# Altium PCB Breathalyzer_PCB.PcbDoc
Units mil, origin at the board's own origin, x right, y up, seen from the top; angles counter-clockwise.
Board outline 3051.18 x 1181.1 mil, 2 copper layers (Top Layer, Bottom Layer); 16 components, 12 nets, 73 pads, 16 vias.
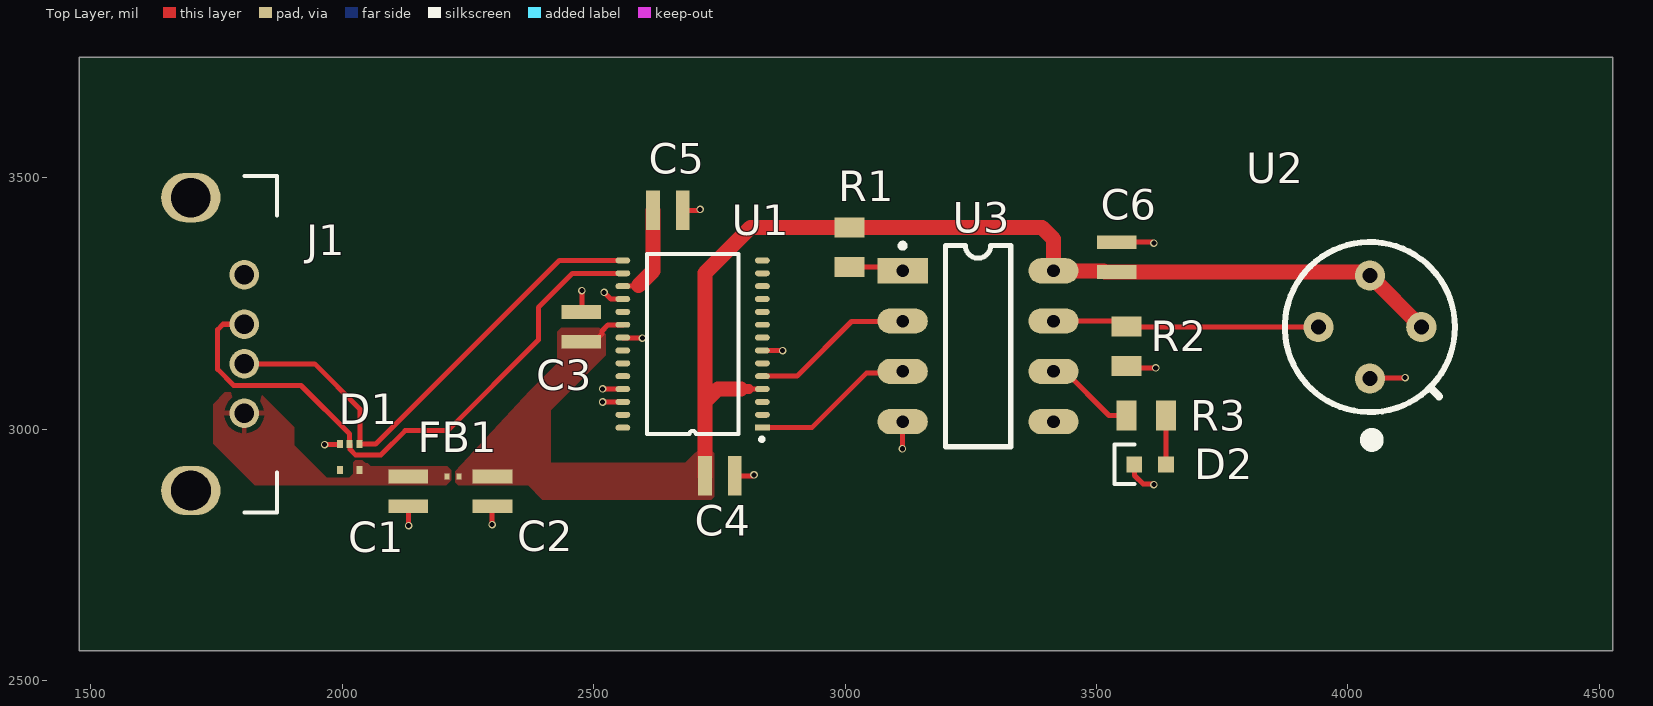
[diagram p0: Top Layer view]
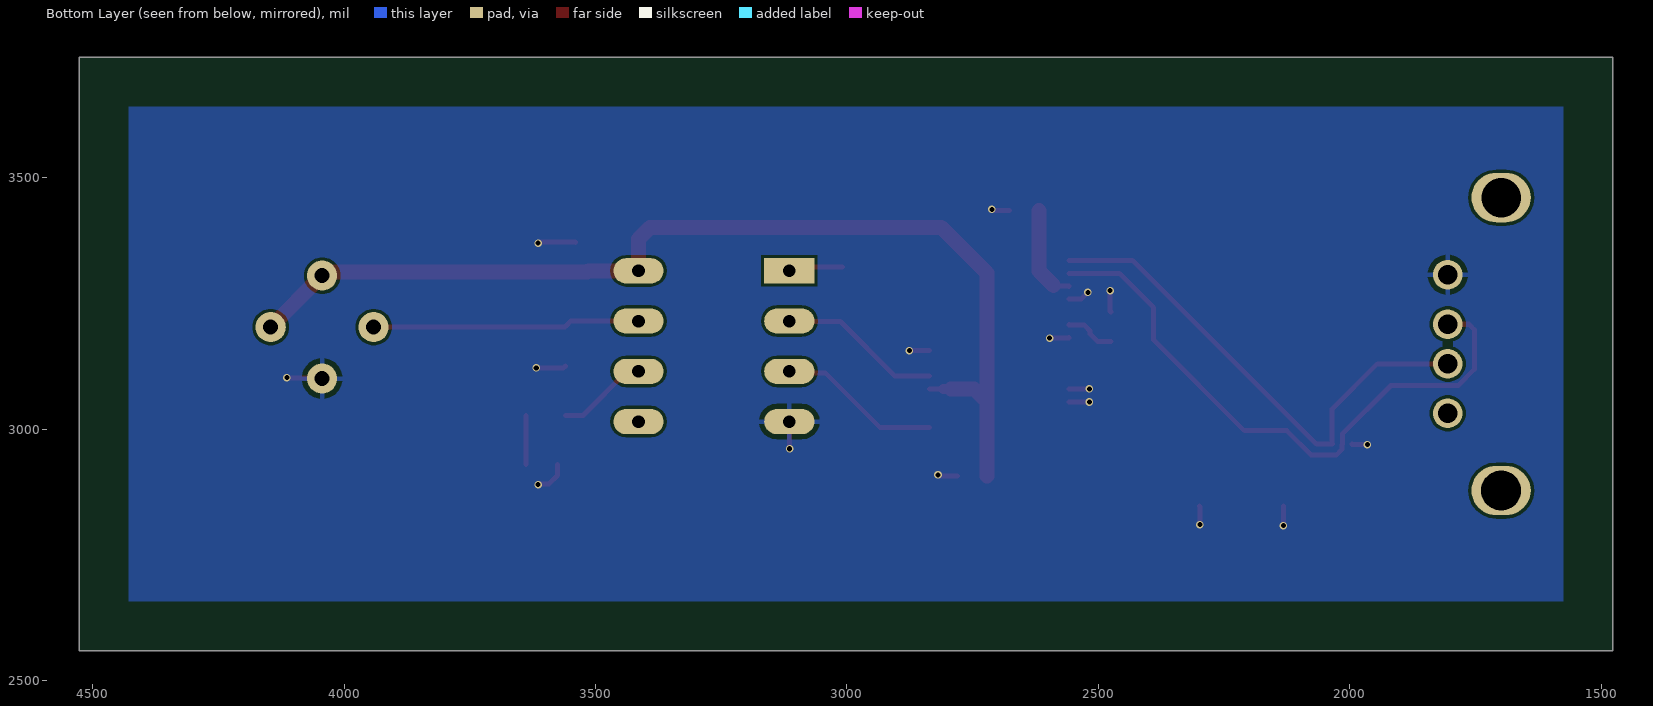
[diagram p1: Bottom Layer view, seen from below]
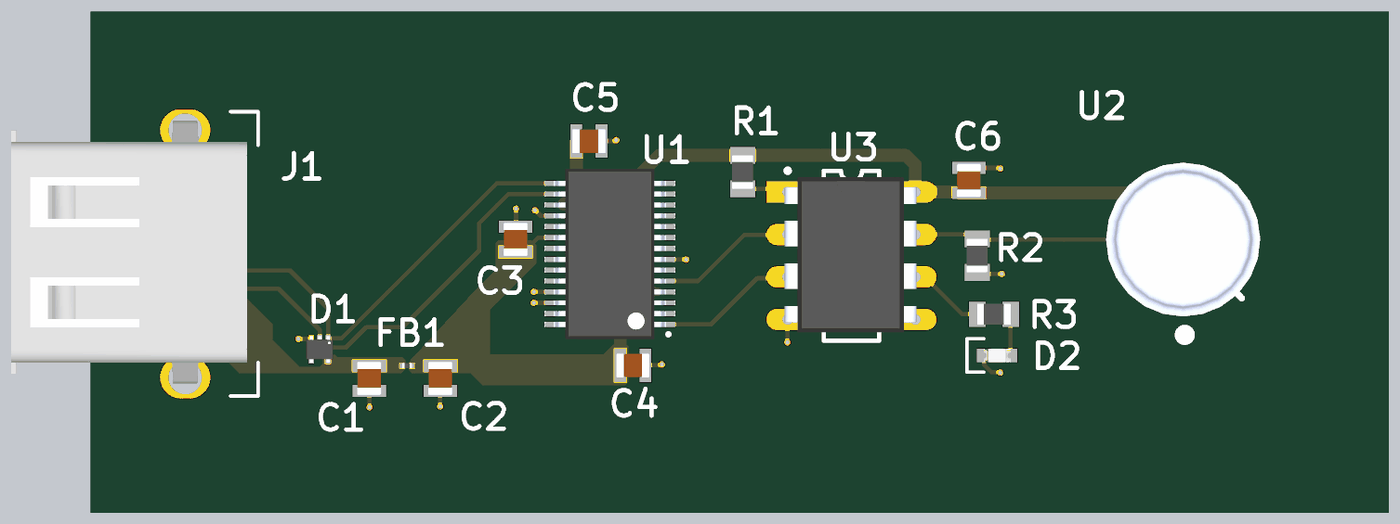
[diagram p2: 3D render of the assembled board from above, using the file's embedded part models]

## Layer stack, top to bottom
Top Solder: solder mask 0.4, Solder Resist, Dk 3.5
Top Layer: signal copper 1.4
Dielectric 1: dielectric 12.6, FR-4, Dk 4.8
Bottom Layer: signal copper 1.4
Bottom Solder: solder mask 0.4, Solder Resist, Dk 3.5

## Board outline
1476.38,2559.06 1476.38,3740.16 4527.56,3740.16 4527.56,2559.06

## Design rules (kind name [scope] priority, off if disabled: settings)
Clearance [All] p1: gap=4 ignorepadtopadclearanceinfootprint=FALSE
MinimumSolderMaskSliver [All] p1: minsoldermaskwidth=3
PolygonConnect [All] p1: thpad.connectstyle=Relief thpad.reliefconductorwidth=10 thpad.reliefentries=4 thpad.polygonreliefangle="90 Angle" thpad.airgapwidth=10 smdpad.connectstyle=Direct smdpad.reliefconductorwidth=10 smdpad.reliefentries=4 smdpad.polygonreliefangle="90 Angle" smdpad.airgapwidth=10 via.connectstyle=Direct via.reliefconductorwidth=10 via.reliefentries=4 via.polygonreliefangle="90 Angle" via.airgapwidth=10
RoutingVias [All] p1: holewidth=10 width=15 viastyle="Through Hole" minholewidth=5 minwidth=10 maxholewidth=28 maxwidth=50
SilkToSilkClearance [All] p1: silktosilkclearance=4
SilkToSolderMaskClearance [IsPad] p1: minsilkscreentomaskgap=4 clearancetoexposedcopper=TRUE
SolderMaskExpansion [All] p1: expansion=2 istentingtop=FALSE
SupplyNets "Schematic Supply Nets_1" [InNet('GND')] p1: voltage=0.000
SupplyNets "Schematic Supply Nets" [InNet('5V')] p2: voltage=0.000
Width [All] p1: maxlimit=100 minlimit=10 preferedwidth=10 minimp=50.000000 maximp=50.000000 favimp=50.000000
27 further rules are at their usual default settings.

## Components (designator, comment, footprint, x,y, rotation, side; value= is the part's Value field where it differs from the comment)
C1 "0805 SMD Capacitor" "Capacitor 0805" 2131.51,2876.23 r270 top value=2u2
C2 "0805 SMD Capacitor" "Capacitor 0805" 2298.83,2876.23 r270 top value=2u2
C3 "0805 SMD Capacitor" "Capacitor 0805" 2475,3203.47 r90 top value=100n
C4 "0805 SMD Capacitor" "Capacitor 0805" 2751,2907 r0 top value=100n
C5 "0805 SMD Capacitor" "Capacitor 0805" 2647.64,3435.04 r0 top value=100n
C6 "0805 SMD Capacitor" "Capacitor 0805" 3540.27,3342.14 r90 top value=100n
D1 "TVS USB diode" "TVS diode" 2014.73,2944.54 r270 top
D2 "0603 SMD LED" "0603 LED" 3607,2930 r180 top
FB1 "Ferrite bead" "Ferrite bead" 2220.09,2905.76 r0 top value=120R
J1 "USB-A Female TH connector" "USB A Female TH connector" 1751.97,3169.29 r90 top
R1 "0805 SMD resistor" "Resistor 0805" 3008.77,3361.83 r90 top value=10k
R2 "0805 SMD resistor" "Resistor 0805" 3559.95,3164.98 r90 top value=560R
R3 "0805 SMD resistor" "Resistor 0805" 3599.32,3027.18 r180 top value=1k
U1 "FT2323RL USB to UART" SOP28 2696.85,3169.29 r180 top
U2 "Figaro TGS2620" TGS2620 4044,3203 r270 top
U3 "ATtiny85-20PU" DIP-8 3264.68,3164.98 r0 top

## Footprints (in the part's own frame and the unit in brackets; to place one, negate y for a bottom-side part, rotate by r counter-clockwise, add the part's x,y. Pads: shape width x height; smd on the part's side, far side on the other; paste and mask are expansions set on the pad)
"0603 LED" [mm]
  rect 0.8x0.8 smd: A(-0.8,0) K(0.8,0)
  silkscreen extent 0.8,-1 1.8,1, body extent -0.8,-0.4 0.8,0.4, height 0.71
"Capacitor 0805" [mm]
  rect 0.7x2 smd: 1(-0.75,0) 2(0.75,0)
  body extent -1,-0.74 1,0.71, height 1.28
DIP-8 [mil] "DIP-8 package footprint"
  rect 100x50 hole 25: 1(-150,150)
  oval 100x50 hole 25: 2(-150,50) 3(-150,-50) 4(-150,-150) 5(150,-150) 6(150,-50) 7(150,50) 8(150,150)
  silkscreen extent -155,-200 65,205, body extent -157,-180 153,184, height 196
"Ferrite bead" [mm]
  rect 0.25x0.3 smd mask+0.05: 1(-0.3,0) 2(0.3,0)
  body extent -0.3,-0.15 0.3,0.18, height 0.3
"Resistor 0805" [mm]
  rect 1x1.5 smd: 1(-1,0) 2(1,0)
  body extent -1,-0.63 1,0.63, height 0.63
SOP28 [mm]
  rect 0.75x0.3 smd: 1(-3.525,4.225)
  oval 0.75x0.3 smd: 2(-3.525,3.575) 3(-3.525,2.925) 4(-3.525,2.275) 5(-3.525,1.625) 6(-3.525,0.975) 7(-3.525,0.325) 8(-3.525,-0.325) 9(-3.525,-0.975) 10(-3.525,-1.625) 11(-3.525,-2.275) 12(-3.525,-2.925) 13(-3.525,-3.575) 14(-3.525,-4.225) 15(3.525,-4.225) 16(3.525,-3.575) 17(3.525,-2.925) 18(3.525,-2.275) 19(3.525,-1.625) 20(3.525,-0.975) 21(3.525,-0.325) 22(3.525,0.325) 23(3.525,0.975) 24(3.525,1.625) 25(3.525,2.275) 26(3.525,2.925) 27(3.525,3.575) 28(3.525,4.225)
  silkscreen extent -3.56,-4.55 2.32,4.87, body extent -3.9,-5.1 3.9,5.1, height 1.86
TGS2620 [mil] "Figaro TGS2620 gas sensor"
  round 60 hole 30: 1(102.36,0) 2(0,-102.36) 3(-102.36,0) 4(0,102.36)
  silkscreen extent -169,-169 228,169, body extent -256,-256 267,267, height 327
"TVS diode" [mm] "TVS diode in SOT5 package."
  rect 0.4x0.3 smd mask+0.05: 1(-0.65,0.5) 2(-0.65,0) 4(0.65,-0.5) 5(0.65,0.5)
  rect 0.4x0.3 smd paste-2539.97 mask+0.05: 3(-0.65,-0.5)
  body extent -0.8,-0.8 0.8,0.8, height 0.56
"USB A Female TH connector" [mm] "USB A Female TH connector"
  round 1.5 hole 1: 1(-3.5,-1.35) 2(-1,-1.35) 3(1,-1.35) 4(3.5,-1.35)
  oval 2.5x3 hole 2: 5(-7.4,1.35) 6(7.4,1.35)
  silkscreen extent -8.5,-3 8.5,-1.35, body extent -7.77,-2.35 7.97,11.75, height 8.39

## Part data
C1 C2 C3 C4 C5 C6: library part "0805 Capacitor"
D1: library part TVS_diode, "TVS DIODE 5.5VWM SOT5", Manufacturer="Texas Instruments", Manufacturer Product Number=TPD3E001DRLR
D2: library part SMD0603_LED
FB1: "Ferrite Beads 0.6mm x 0.3mm x 0.3mm, -55 to +125 degC, 200mA, 120ohm, 390mohm", Manufacturer=TDK, Manufacturer Product Number=MMZ0603Y121CT000
J1: library part "USB-A Female"
R1 R2 R3: library part "0805 Resistor"
U1: library part FT2323RL, "USB Bridge, USB to UART USB 2.0 UART Interface 28-SSOP", Manufacturer=FTDI, Manufacturer Product Number=FT232RL
U2: library part TGS2620, "Figaro TGS2620 gas sensor", Manufacturer=Figaro, Manufacturer Product Number="Figaro TGS2620"
U3: library part ATtiny85, "AVR AVR® ATtiny, Functional Safety (FuSa) Microcontroller IC 8-Bit 20MHz 8KB (4K x 16) FLASH 8-PDIP", Manufacturer="Microchip Technology", Manufacturer Product Number=ATTINY85-20PU

## Via types
v1: diameter 15, hole 10, Top Layer to Bottom Layer, 16 vias

## Nets (pads, with @x,y where several pads share a name; then routed paths per layer and width w, separated by ;. In a path a pad name is that pad's centre, name@x,y a point inside that pad or via, vN(x,y) a via of type N, cw(c..) or ccw(c..) an arc to the next point about the centre after c; other vN are vias at no path point)
3V3: C5.1 U1.17 | length 193.4
  Top Layer w10: U1.17@2558.42,3284.1 U1.17 2587.45,3284.45 2589,3286
  Top Layer w30: 2589,3286 2589.43,3286 2618.11,3314.68 C5.1
5V: C2.1 C3.1 C4.1 C6.1 FB1.2 R1.2 U1.4 U1.20 U2.3 U2.4 U3.8 | length 2210.3
  Top Layer w10: C3.1 2500.59,3173.94 2516.44,3189.8 2516.44,3195.44 2528.33,3207.33 2557.72,3207.33 U1.20 ; 2809,3080 2809.28,3079.72 U1.4
  Top Layer w20: 2793,3080 2809,3080
  Top Layer w30: C4.1 2721.5,3054.5 ; 2793,3080 2747,3080 2721.5,3054.5 ; U2.4 U2.3 4035.88,3305.36 4028.63,3312.61 C6.1 3517.12,3312.61 3514.76,3314.98 U3.8 3414.68,3378.32 3391.8,3401.2 R1.2 2812.2,3401.2 2721.5,3310.5 2721.5,3054.5
BLOW_LED: R3.2 U3.6 | length 181.6
  Top Layer w10: U3.6 3437.47,3114.98 3525.27,3027.18 R3.2
GND: C1.2 C2.2 C3.2 C4.2 C5.2 C6.2 D1.3 D2.K J1.4 R2.1 U1.7 U1.18 U1.21 U1.25 U1.26 U2.1 U3.4 | length 755.4
  Top Layer w10: v1(1965,2969) 1994.14,2969 1995.04,2969.91 D1.3 ; C1.2 2132,2846.21 v1(2132,2808) ; v1(2298,2810) 2298,2845.87 C2.2 ; C3.2 2476.38,3234.38 v1(2476.38,3275.59) ; v1(2518,3054) 2518.07,3054.07 2558,3054.07 U1.26 ; v1(2518,3080) 2518.14,3079.86 2557.93,3079.86 U1.25 ; v1(2521,3272) 2534.14,3258.86 U1.18 U1.18@2557.72,3258.51 ; U1.21 2558.42,3181.74 2596.26,3181.74 v1(2597,3181) ; C5.2 2708.69,3435.04 2710.65,3437 v1(2712,3437) ; C4.2 2815.65,2907 2817.65,2909 v1(2819,2909) ; U1.7 2835.88,3156.25 2875.75,3156.25 v1(2876,3156) ; v1(3114,2961) 3114,3014.3 U3.4 ; C6.2 3540.43,3371.83 3611.06,3371.83 3612.82,3370.08 v1(3614.17,3370.08) ; R2.1 3563.51,3122.05 v1(3618.11,3122.05) ; D2.K 3576,2929.5 3576,2908 3593.28,2890.72 3613.22,2890.72 v1(3614.17,2889.76) ; U2.1 4044.86,3101.5 4113.31,3101.5 v1(4114.17,3102.36)
MCU_ADC: R2.2 U2.2 U3.7 | length 545.5
  Top Layer w10: U3.7 3549.32,3214.98 R2.2 3561.3,3203 U2.2 ; U2.2@3940.12,3224.03 U2.2@3953.65,3224.03
MCU_RX: U1.1 U3.3 | length 325.4
  Top Layer w10: U1.1 2933.95,3002.95 3043,3112 3111.7,3112 U3.3
MCU_TX: U1.5 U3.2 | length 324.5
  Top Layer w10: U1.5 2904.31,3105.31 3013,3214 3113.7,3214 U3.2
NetD2_A: D2.A R3.1 | length 97.3
  Top Layer w10: D2.A 3638.69,2930.2 R3.1
RESET: R1.1 U3.1 | length 109
  Top Layer w10: R1.1 3107.2,3322.46 U3.1
USBM_PROTECTED: D1.2 J1.3 U1.16 | length 1218
  Top Layer w10: J1.3 1762.66,3208.66 1752,3198 1752,3119 1784,3087 1918,3087 2014.73,2990.27 D1.2 2015.63,2969.23 2015.63,2959.37 2026,2949 2077,2949 2125,2997 2209.6,2997 2390,3177.4 2390,3242 2458.04,3310.04 U1.16
USBP_PROTECTED: D1.1 J1.2 U1.15 | length 1012.3
  Top Layer w10: J1.2 1945.08,3129.92 2035,3040 2035,2970.72 D1.1 2066.13,2970.13 2431.63,3335.63 U1.15
VBUS: C1.1 D1.5 FB1.1 J1.1
pads on no net: D1.4 J1.5 J1.6 U1.2 U1.3 U1.6 U1.8 U1.9 U1.10 U1.11 U1.12 U1.13 U1.14 U1.19 U1.22 U1.23 U1.24 U1.27 U1.28 U3.5

## Polygon pours and split planes (outlines as drawn)
5V on Top Layer "5V_L01_P002" (solid, pour order 2): 2225,2916 2225,2894 2231,2888 2370,2888 2415,2933 2415,3038 2524,3147 2524,3189 2511,3202 2436,3202 2428,3194 2428,3131 2373,3076
5V on Top Layer "5V_L01_P003" (solid, pour order 3): 2370,2888 2398,2860 2734,2860 2740,2866 2740,2952 2734,2958 2709,2958 2708,2958 2699,2950 2682,2933 2415,2933
VBUS on Top Layer "VBUS_L01_P001" (solid, pour order 1): 2039.49,2938 2045.49,2932 2051,2932 2057,2926 2209,2926 2217,2918 2217,2898 2207,2888 2017,2888 2034.5,2905.5 2034.5,2938
VBUS on Top Layer "VBUS_L01_P000" (solid, pour order 0): 1835,3073 1904,3004 1904,2968 1969,2903 2014,2903 2022,2911 2022,2934 2026,2938 2043,2938 2048,2933 2047,2932 2047,2898 2037,2888 1826,2888 1743,2971 1743,3050 1766,3073
GND on Bottom Layer "GND_L02_P004" (solid, pour order 4): 1574.8,3641.73 1574.8,2657.48 4429.13,2657.48 4429.13,3641.73

## Silkscreen, mask and mechanical layers (free items; w line width, h text height)
Mechanical 1:
  the board outline again, w7.87